# Allegro board AVRUSB500.brd
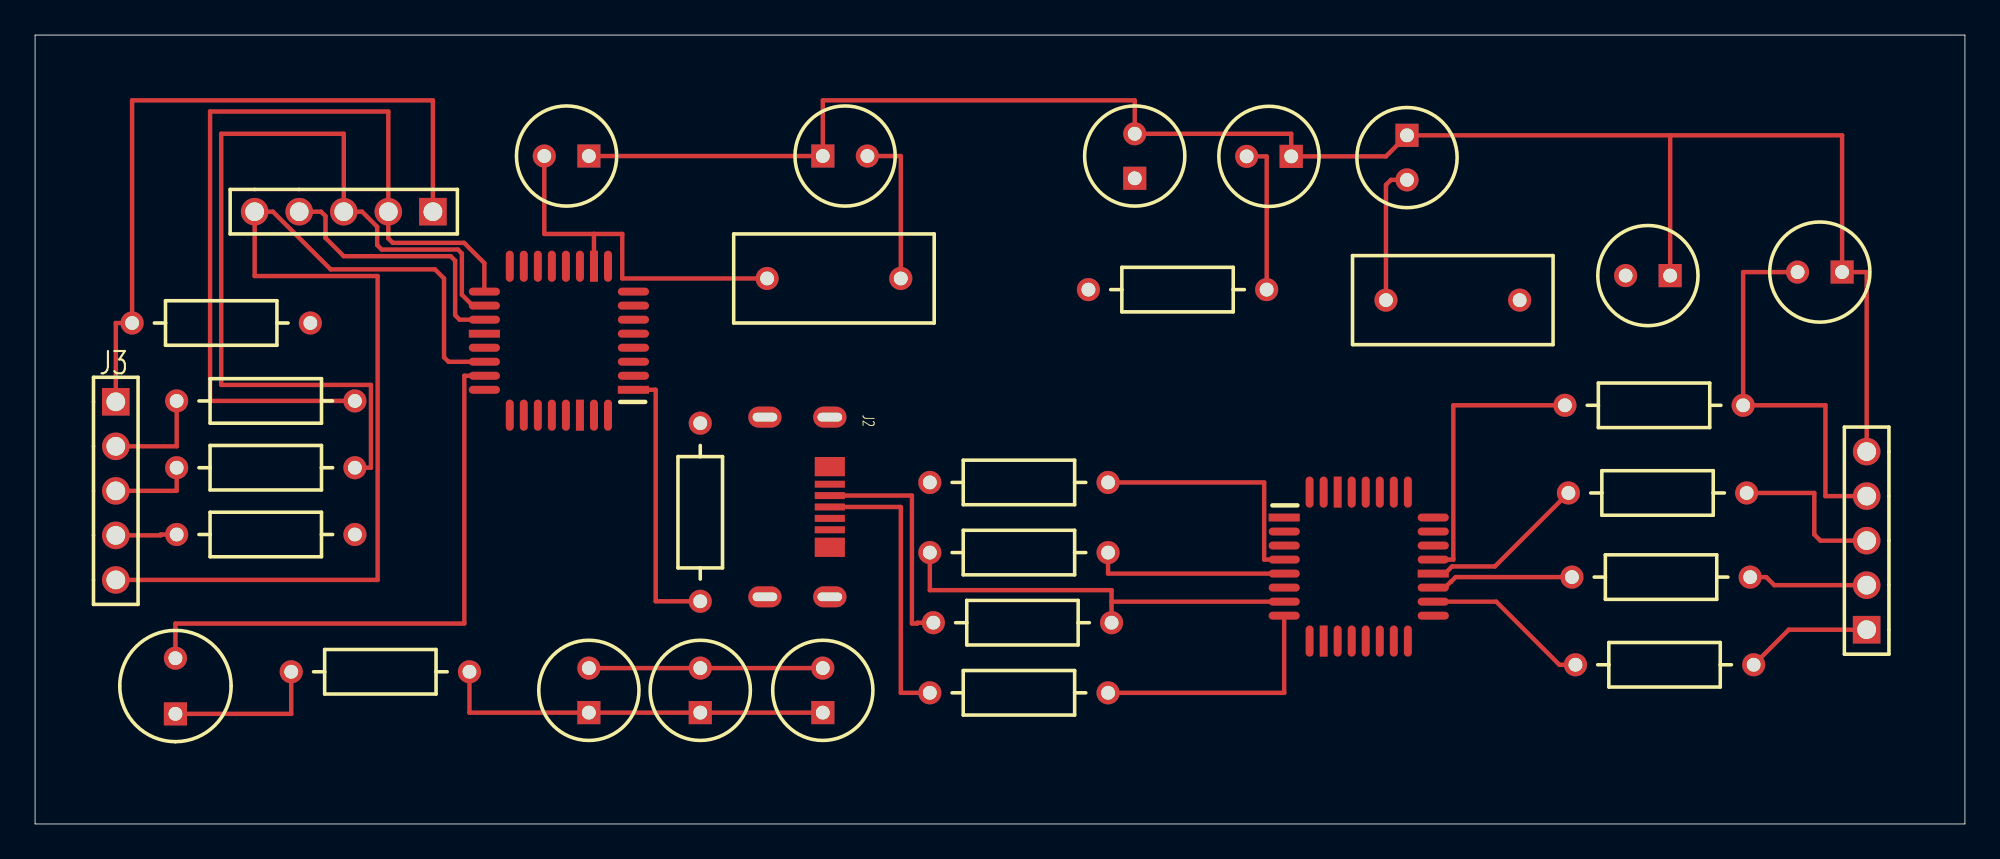
[diagram p0: board, top side]
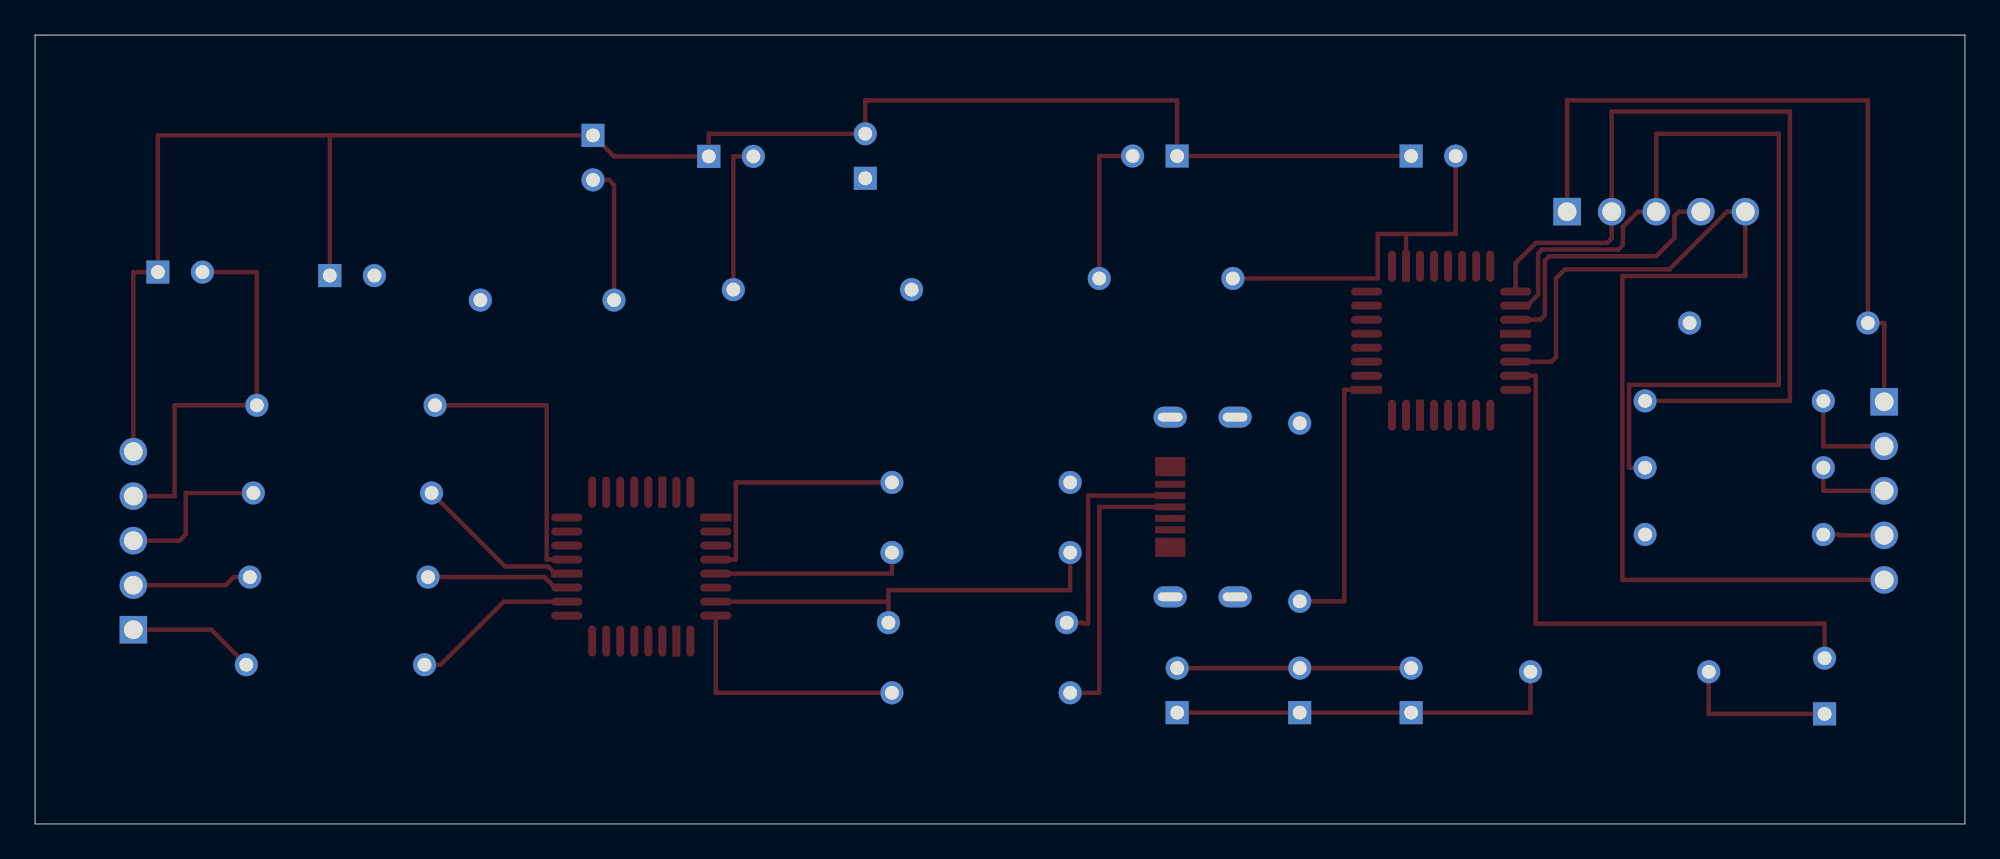
[diagram p1: board, bottom side, seen from below]

Outline 110 x 45 mm; copper layers: TOP, BOTTOM. Coordinates in mm from the lower left corner of the outline.
Outline path: 0,45 110,45 110,0 0,0 0,45

## Design rules (mm)
constraint set DEFAULT: min track width 0.254, pair gap 0.254

## Placement (name value [footprint] x y rotation side)
C1  47nF  [CPCYL1D225LS100031]  71.6 38.08 180 top
C2  27pF  [CPCYL1D225LS100031]  78.2 39.28 270 top
C3  27pF  [CPCYL1D225LS100031]  93.2 31.28 180 top
C4  47nF  [CPCYL1D225LS100031]  62.68 36.83 90 top
C5  100nF  [CPCYL1D225LS100031]  37.92 6.35 90 top
C6  1uF  [CPCYL1D225LS100031]  31.56 6.35 90 top
C7  100nF  [CPCYL1D225LS100031]  44.9 38.1 0 top
C8  100nF  [CPCYL1D225LS100031]  31.56 38.1 180 top
C9  100nF  [CPCYL1D225LS100031]  44.9 6.35 90 top
C10  22nF  [CPCYL1D225LS100031]  103 31.48 180 top
D1  LED  [CYLD250LS125031]  8 6.28 90 top
IC1  ATmega8  [QUAD80M32WG900]  34.11 24.76 90 top
J1  bbpg_Bitbang  [BLKCON100VHTM1SQSW1005]  104.4 11.08 90 top
J2  USBA  [MICRO_USB]  41.6 18.08 270 top
J3  avrusb500_out  [BLKCON100VHTM1SQSW1005]  4.6 24.08 270 top
J4  firmware_in  [BLKCON100VHTM1SQSW1005]  22.68 34.93 180 top
R1  470  [AX400X100031]  70.2 30.48 180 top
R2  220  [AX400X100031]  87.2 23.88 0 top
R3  220  [AX400X100031]  87.4 18.88 0 top
R4  220  [AX400X100031]  87.6 14.08 0 top
R5  27  [AX400X100031]  51 7.48 0 top
R6  27  [AX400X100031]  51.2 11.48 0 top
R7  1.5k  [AX400X100031]  51 15.48 0 top
R8  2.2  [AX400X100031]  51 19.48 0 top
R9  10k  [AX400X100031]  37.92 22.86 270 top
R10  470  [AX400X100031]  14.6 8.68 0 top
R11  1k  [AX400X100031]  18.23 16.51 180 top
R12  220  [AX400X100031]  18.23 20.32 180 top
R13  1k  [AX400X100031]  18.23 24.13 180 top
R14  220  [AX400X100031]  87.8 9.08 0 top
R15  220  [AX400X100031]  15.69 28.57 180 top
U1  FT232BM  [QUAD80M32WG900]  71.2 17.48 270 top
Y1  3.6864Mhz  [RAD450X200LS300031]  41.73 31.12 0 top
Y2  6Mhz  [RAD450X200LS300031]  77 29.88 0 top

## Library data of the parts
C1-C4 C7 C8 C10 = CAPACITOR NON-POL: alternate symbols: (SML2015)
C5 C9 = CAPACITOR NON-POL: alternate symbols: (SMDCAP)
C6 = CAPACITOR POL: alternate symbols: (SMDCAP)
D1 = LED
IC1 = ATmega8-DIL28_1
J1 J3 J4 = CON5
J2 = CON4_7
R1-R15 = R: alternate symbols: (SML2015)
U1 = FT232BM_2
Y1 Y2 = ZTA

## Footprints (pads in the part's own frame, mm; a bottom-side part is the same pattern mirrored in y, then rotated)
AX400X100031
  round 1.321 hole 0.787: 1(0,0) 2(10.16,0)
BLKCON100VHTM1SQSW1005
  rect 1.575x1.575 hole 1.067: 1(0,0)
  round 1.575 hole 1.067: 2(2.54,0) 3(5.08,0) 4(7.62,0) 5(10.16,0)
CPCYL1D225LS100031
  rect 1.321x1.321 hole 0.787: 1(0,0)
  round 1.321 hole 0.787: 2(2.54,0)
CYLD250LS125031
  rect 1.321x1.321 hole 0.787: 1(0,0)
  round 1.321 hole 0.787: 2(3.175,0)
MICRO_USB
  oval 1.2x1.9 hole 0.5x1.4: (-5.125,3.7) (-5.125,0) (5.125,3.7) (5.125,0)
  rect 1.1x1.72 smd: (-2.3,3.7) (2.3,3.7)
  rect 0.4x1.72 smd: 1(-1.3,3.7) 2(-0.65,3.7) 3(0,3.7) 4(0.65,3.7) 5(1.3,3.7)
QUAD80M32WG900
  rect 0.457x1.778 smd: 1(0,0) 20(3.2,8.496)
  oval 0.457x1.778 smd: 2(0.8,0) 3(1.6,0) 4(2.4,0) 5(3.2,0) 6(4,0) 7(4.801,0) 8(5.601,0) 17(5.601,8.496) 18(4.801,8.496) 19(4,8.496) 21(2.4,8.496) 22(1.6,8.496) 23(0.8,8.496) 24(0,8.496)
  oval 1.778x0.457 smd: 9(7.048,1.448) 11(7.048,3.048) 12(7.048,3.848) 13(7.048,4.648) 14(7.048,5.448) 15(7.048,6.248) 16(7.048,7.048) 25(-1.448,7.048) 26(-1.448,6.248) 27(-1.448,5.448) 28(-1.448,4.648) 29(-1.448,3.848) 31(-1.448,2.248) 32(-1.448,1.448)
  rect 1.778x0.457 smd: 10(7.048,2.248) 30(-1.448,3.048)
RAD450X200LS300031
  round 1.321 hole 0.787: 1(0,0) 2(7.62,0)

## Nets
+5V: J2.4 R8.1
GND: C1.1 C2.1 C3.1 C4.2 C5.2 C6.2 C7.1 C8.1 C9.2 C10.1 IC1.8 IC1.22 J1.5 J2.1 J3.5 J4.5 U1.9 U1.14 U1.17 U1.29 U1.31
VCC: C5.1 C6.1 C9.1 IC1.7(VCC) IC1.20 R1.2 R8.2 R9.1 R10.2 U1.3 U1.4 U1.13 U1.26
BMISO: J1.3 R3.2
BMOSI: J1.2 R4.2
BRESET: J1.1 R14.2
BSCK: C10.2 J1.4 R2.2
D+: J2.2 R6.1
D-: J2.3 R5.1
F_MISO: IC1.18 J4.3 R12.1
F_MOSI: IC1.17 J4.2 R13.1
F_SCK: IC1.19 J4.4 R11.1
MISO: J3.3 R12.2
MOSI: J3.2 R13.2
RESET: IC1.1 J3.1 J4.1 R9.2 R15.2
RXD: IC1.2 U1.24
SCK: J3.4 R11.2
TXD: IC1.3 U1.25
N02483: R6.2 R7.1 U1.7
N02615: R5.2 U1.8
N03527: C4.1 U1.6
N06839: R2.1 U1.21
N06967: R3.1 U1.20
N07033: R4.1 U1.19
N07247: R14.1 U1.18
N11951: R7.2 U1.5
N15182: C7.2 IC1.9 Y1.2
N15289: C8.2 IC1.10 Y1.1
N19734: D1.2(CATHODE) IC1.23
N20572: D1.1 R10.1
N22544: IC1.16 R15.1
N41098: C3.2 U1.27 Y2.2
N41106: C2.2 U1.28(XTOUT) Y2.1
N49165: C1.2 R1.1 U1.30

Pads without a net: IC1 4 5 6 11 12 13 14 15 21 24 25 26 27 28 29 30 31 32; J2 5; U1 1 2 10 11 12 15 16 22 23 32

## Routing (per net, layer and track width the routed paths; a pad name or vN(x,y) marks a point on that pad's centre or on a via; arc(x,y) is an arc through that point)
GND: length 181.3
  TOP w0.254: C9.2 C5.2 C6.2 ; J3.5 19.53,13.92 19.53,31.25 12.52,31.25 12.52,34.93 13.56,34.93 16.85,31.64 22.79,31.64 23.31,31.12 23.31,26.62 23.56,26.37 IC1.22 ; J1.5 104.4,31.48 C10.1 103,39.28 93.2,39.28 ; 93.2,39.28 C2.1 77,38.08 C1.1 71.6,39.37 C4.2 62.68,41.28 44.9,41.28 C7.1 C8.1 ; 93.2,39.28 C3.1
VCC: length 36.9
  TOP w0.254: C9.1 C5.1 C6.1 24.76,6.35 R10.2 ; R8.2 70.06,19.48 70.06,15.08 U1.4
BMISO: length 9.4
  TOP w0.254: R3.2 101.42,18.88 101.42,16.51 101.76,16.16 J1.3
BMOSI: length 6.8
  TOP w0.254: R4.2 98.67,14.08 99.13,13.62 J1.2
BRESET: length 7.3
  TOP w0.254: R14.2 99.96,11.08 J1.1
BSCK: length 22.9
  TOP w0.254: J1.4 102.05,18.7 102.05,23.88 R2.2 97.36,31.48 C10.2
D+: length 13.3
  TOP w0.254: J2.2 49.98,18.73 49.98,11.43 50.29,11.43 50.29,11.48 R6.1
D-: length 16.3
  TOP w0.254: J2.3 49.35,18.08 49.35,7.48 R5.1
F_MISO: length 52.2
  TOP w0.254: IC1.18 24.95,29.57 24.33,30.19 24.33,32.54 24.1,32.77 19.75,32.77 19.5,33.02 19.5,34.06 18.64,34.93 J4.3 17.6,39.37 10.61,39.37 10.61,25.04 19.14,25.04 19.14,20.32 R12.1
F_MOSI: length 49.8
  TOP w0.254: R13.1 9.98,24.13 9.98,40.64 20.14,40.64 20.14,33.4 20.39,33.15 24.45,33.15 25.61,31.99 IC1.17
F_SCK: length 15.7
  TOP w0.254: J4.4 16.3,34.93 16.55,34.67 16.55,33.43 17.59,32.38 23.69,32.38 23.95,32.13 23.95,29.02 24.2,28.76 IC1.19
MISO: length 4.8
  TOP w0.254: R12.2 8.07,19 J3.3
MOSI: length 6.1
  TOP w0.254: R13.2 8.07,21.54 J3.2
RESET: length 57.5
  TOP w0.254: J3.1 4.6,28.57 R15.2 5.53,41.28 22.68,41.28 J4.1 ; R9.2 35.38,12.7 35.38,24.76 IC1.1
SCK: length 3.5
  TOP w0.254: R11.2 7.16,16.51 7.16,16.46 J3.4
N02483: length 24.2
  TOP w0.254: 61.36,12.68 U1.7 ; 61.36,12.68 R6.2 ; 61.36,12.68 61.36,13.33 51,13.33 R7.1
N02615: length 14.4
  TOP w0.254: U1.8 71.2,7.48 R5.2
N06839: length 16.3
  TOP w0.254: U1.21 80.84,15.08 80.84,23.88 R2.1
N06967: length 9.6
  TOP w0.254: R3.1 83.21,14.69 80.76,14.69 80.36,14.28 U1.20
N07033: length 8.2
  TOP w0.254: R4.1 80.97,14.08 80.71,13.82 80.7,13.82 80.36,13.48 U1.19
N07247: length 9.6
  TOP w0.254: R14.1 86.89,9.08 83.29,12.68 U1.18
N11951: length 11.2
  TOP w0.254: U1.5 61.16,14.28 R7.2
N15182: length 8.9
  TOP w0.254: Y1.2 49.35,38.1 C7.2
N15289: length 21.5
  TOP w0.254: 31.86,33.66 29.03,33.66 C8.2 ; 31.86,33.66 33.47,33.66 33.47,31.12 Y1.1 ; 31.86,33.66 IC1.10
N19734: length 33.7
  TOP w0.254: D1.2 8,11.43 24.47,11.43 24.47,25.56 IC1.23
N20572: length 9
  TOP w0.254: R10.1 14.6,6.28 D1.1
N41106: length 7.9
  TOP w0.254: C2.2 77.29,36.74 77,36.45 Y2.1
N49165: length 8.7
  TOP w0.254: C1.2 70.2,38.08 R1.1
